# Altium PCB NE555DXZD.PcbDoc
Units mil, origin at the board's own origin, x right, y up, seen from the top; angles counter-clockwise.
Board outline 6000 x 4000 mil, 2 copper layers (Top Layer, Bottom Layer); 8 components, 6 nets, 23 pads, 0 vias.
Unrouted connection lines stored in the file: 1.
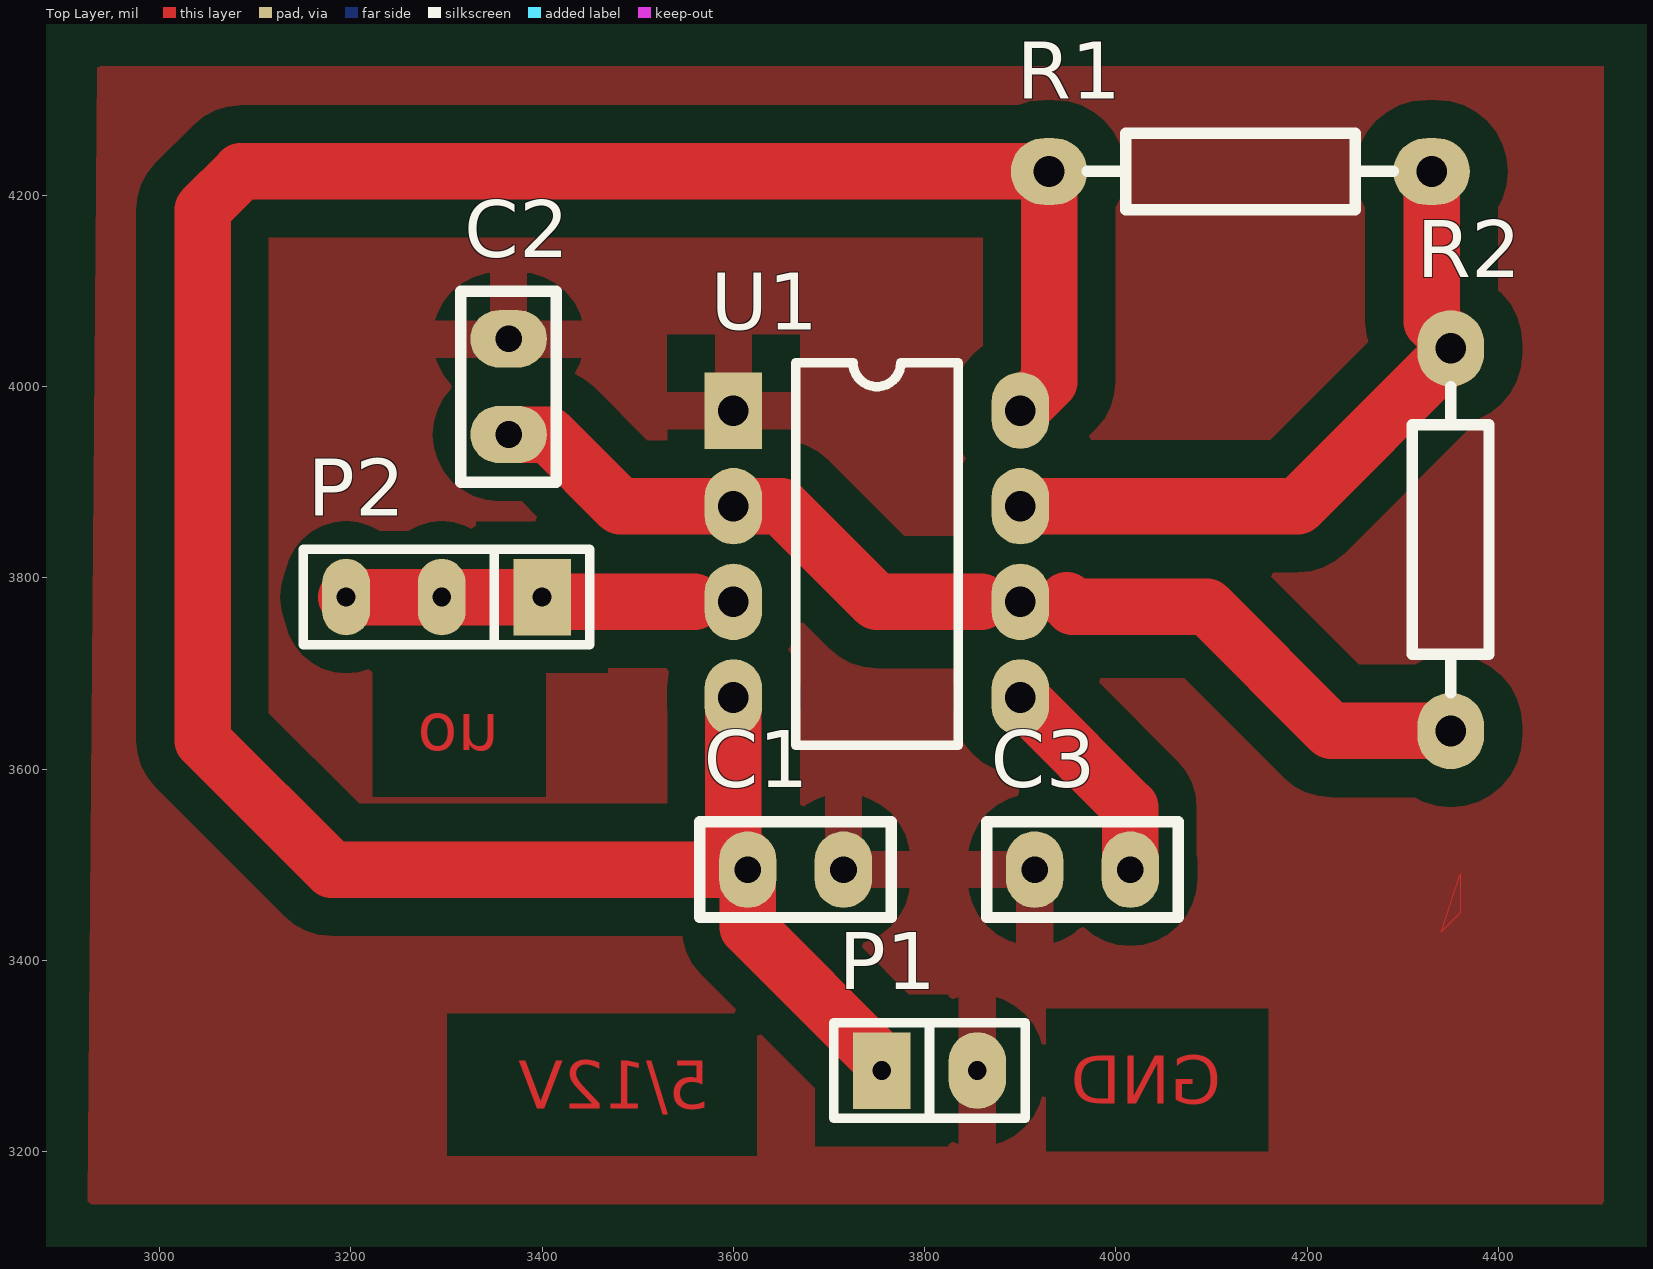
[diagram p0: Top Layer view]
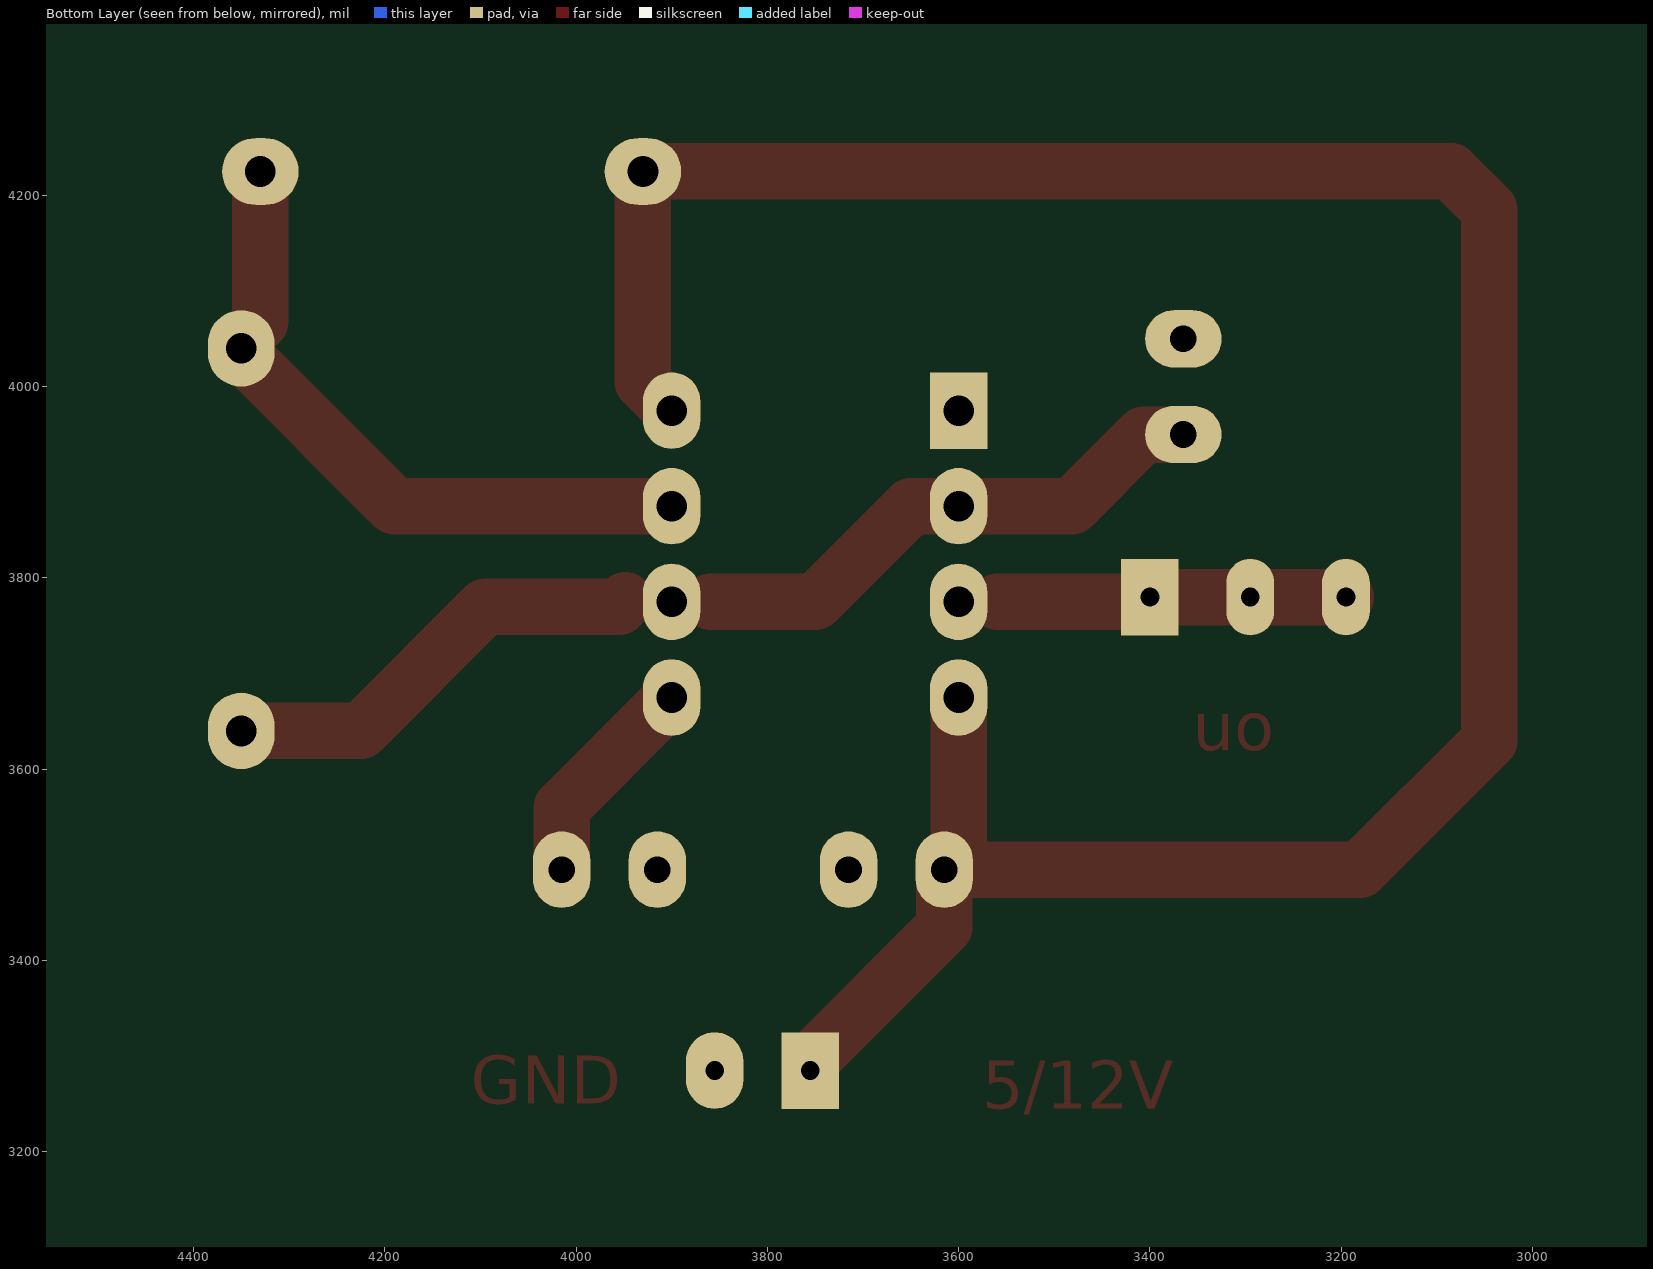
[diagram p1: Bottom Layer view, seen from below]

## Layer stack, top to bottom
Top Solder: solder mask 0.4, Solder Resist, Dk 3.5
Top Layer: signal copper 1.4
Dielectric 1: dielectric 12.6, FR-4, Dk 4.8
Bottom Layer: signal copper 1.4
Bottom Solder: solder mask 0.4, Solder Resist, Dk 3.5

## Board outline
1000,1000 7000,1000 7000,5000 1000,5000

## Design rules (kind name [scope] priority, off if disabled: settings)
Clearance [All] p1: gap=39.37 ignorepadtopadclearanceinfootprint=FALSE
PolygonConnect [All] p1: connectstyle=Relief reliefconductorwidth=39.37 reliefentries=4 polygonreliefangle="90 Angle" airgapwidth=39.37
RoutingVias [All] p1: holewidth=28 width=50 viastyle="Through Hole" minholewidth=28 minwidth=50 maxholewidth=28 maxwidth=50
SolderMaskExpansion [All] p1: expansion=4 istentingtop=FALSE
Width [All] p1: maxlimit=78.74 minlimit=10 preferedwidth=59.06
30 further rules are at their usual default settings.

## Components (designator, comment, footprint, x,y, rotation, side; value= is the part's Value field where it differs from the comment)
C1 "104" RAD0.1 3665,3495 r0 top
C2 "CAP" RAD0.1 3365,4000 r90 top
C3 "0.01u" RAD0.1 3965,3495 r180 top
P1 "2pin" 2pin针 3755,3285 r0 top
P2 "3pin" 3PIN排针 3400,3780 r180 top
R1 "RES" AXIAL0.4 4130,4225 r180 top
R2 "RES" AXIAL0.4 4350,3840 r90 top
U1 "NE555" 8pin座 3600,3975 r0 top

## Footprints (in the part's own frame and the unit in brackets; to place one, negate y for a bottom-side part, rotate by r counter-clockwise, add the part's x,y. Pads: shape width x height; smd on the part's side, far side on the other; paste and mask are expansions set on the pad)
2pin针 [mil]
  rect 60x80 hole 19.68: 1(0,0)
  oval 60x80 hole 19.68: 2(100,0)
  silkscreen extent -50,-50 150,50
3PIN排针 [mil]
  rect 60x80 hole 19.68: 1(0,0)
  oval 50x80 hole 19.68: 2(105,0) 3(205,0)
  silkscreen extent -50,-50 250,50
8pin座 [mil]
  rect 60x80 hole 32: 1(0,0)
  oval 60x80 hole 32: 2(0,-100) 3(0,-200) 4(0,-300) 5(300,-300) 6(300,-200) 7(300,-100) 8(300,0)
  silkscreen extent 65,-350 235,50
AXIAL0.4 [mil]
  oval 80x70 hole 32: 1(-200,0) 2(200,0)
  silkscreen extent -160,-40 160,40
RAD0.1 [mil]
  oval 60x80 hole 28: 1(-50,0) 2(50,0)
  silkscreen extent -100,-50 100,50

## Part data
C1 C3: library part CAP

## Nets (pads, with @x,y where several pads share a name; then routed paths per layer and width w, separated by ;. In a path a pad name is that pad's centre, name@x,y a point inside that pad or via, vN(x,y) a via of type N, cw(c..) or ccw(c..) an arc to the next point about the centre after c; other vN are vias at no path point)
GND: C1.2 C2.2 C3.2 P1.2 U1.1
NetC2_1: C2.1 R2.1 U1.2 U1.6 | length 1024.8
  Top Layer w59.06: C2.1 3365.18,3949.82 3406.6,3949.82 3481.42,3875 U1.2 3649.86,3875 3749.86,3775 3859,3775 ; 3948.29,3776.57 3954.86,3770 4095,3770 4225,3640 R2.1
NetC3_1: C3.1 U1.5 | length 215.6
  Top Layer w59.06: U1.5@3908.53,3666.47 4014.82,3560.18 4014.82,3495.18 C3.1
NetP2_1: P2.1 P2.2 P2.3 U1.3 | length 368.7
  Top Layer w59.06: P2.3 P2.2 P2.1 3400,3775.54 3400.47,3775.07 3550.07,3775.07 3550.14,3775 3559,3775
NetR1_1: R1.1 R2.2 U1.7 | length 714.6
  Top Layer w59.06: U1.7 4190,3875 4350,4035 R2.2 4350,4047.96 4330,4067.96 R1.1
VCC: C1.1 P1.1 R1.2 U1.4 U1.8 | length 2787.1
  Top Layer w59.06: U1.4 3600,3520.26 3615,3505.26 C1.1 ; P1.1 3755,3295 3615.18,3434.82 3615.18,3494.82 C1.1 ; U1.8@3908.53,3983.53 3930,4005 R1.2 3085,4225 3045,4185 3045,3630 3180,3495 C1.1

## Polygon pours and split planes (outlines as drawn)
GND on Top Layer "GND_L01_P000" (solid, pour order 0): 2935,4340 2940,4335 4510,4335 4510,3150 4515,3145 2925,3145
GND on Top Layer "GND_L01_P001" (solid, pour order 1): 4360,3490 4360,3450 4340,3430

## Other copper
Top Layer:
  text "uo" at 3355,3620 h50
  text "GND" at 4110,3250 h50
  text "5/12V" at 3575,3245 h50

## Silkscreen, mask and mechanical layers (free items; w line width, h text height)
Top Overlay:
  text "中间不共地，手动接地" at 3190,3024.53 h50
  text "R2改滑变调占空比" at 3775,3024.53 h50
  text "电容103以上，实际频率比理论小" at 3190,2934.53 h50